# Altium PCB Tj_Monitor.PcbDoc
Units mil, origin at the board's own origin, x right, y up, seen from the top; angles counter-clockwise.
Board outline 605 x 540 mil, 2 copper layers (Top Layer, Bottom Layer); 8 components, 7 nets, 28 pads, 0 vias.
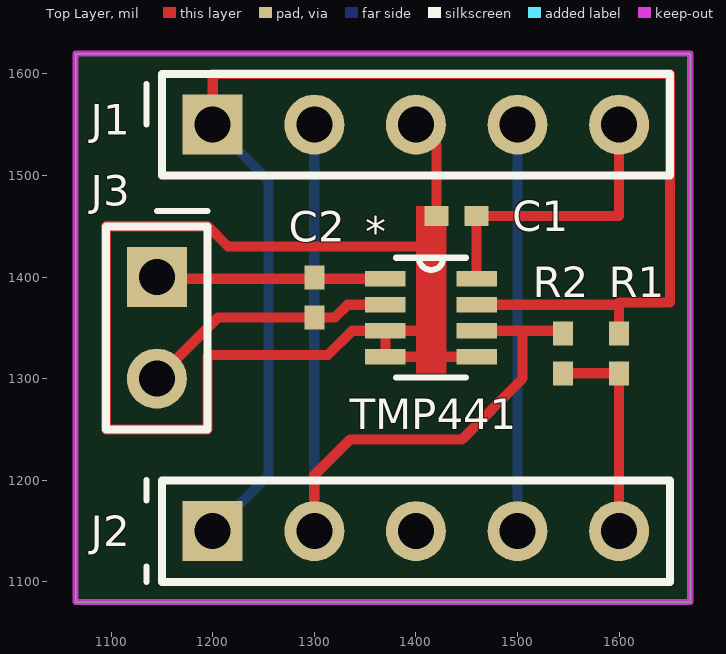
[diagram p0: Top Layer view]
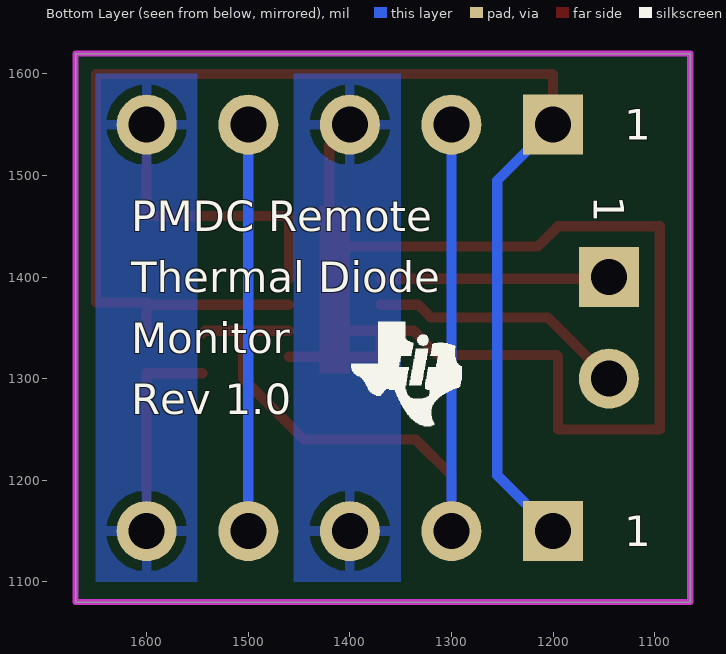
[diagram p1: Bottom Layer view, seen from below]

## Layer stack, top to bottom
Top Layer: signal copper 1.4
Dielectric: dielectric 12.6, FR-4, Dk 4.8
Bottom Layer: signal copper 1.4

## Board outline
1065,1620 1670,1620 1670,1080 1065,1080 1065,1620

## Design rules (kind name [scope] priority, off if disabled: settings)
Clearance [All] p1: gap=10
MinimumSolderMaskSliver [All] p1: minsoldermaskwidth=2
PolygonConnect [All] p1: connectstyle=Relief reliefconductorwidth=10 reliefentries=4 polygonreliefangle="90 Angle"
RoomDefinition Tj_Monitor [InComponentClass('Tj_Monitor')] p1: confinementstyle=ConfineIn formatcopy=TRUE lockcomponents=FALSE outline 455,535 4500,535 4500,3895 455,3895
RoutingVias [All] p1: holewidth=28 width=50 viastyle="Through Hole" minholewidth=28 minwidth=50 maxholewidth=28 maxwidth=50
SilkscreenOverComponentPads [All] p1: minsilkscreentomaskgap=10
SolderMaskExpansion [All] p1: expansion=4
Width [All] p1: maxlimit=50 minlimit=6 preferedwidth=10 minimp=50.000000 maximp=50.000000 favimp=50.000000
26 further rules are at their usual default settings.

## Components (designator, comment, footprint, x,y, rotation, side; value= is the part's Value field where it differs from the comment)
C1 "Cap Semi" 0402 1440,1460 r0 top
C2 "Cap Semi" 0402 1300,1380 r90 top
J1 "Header 5" HDR1X5 1200,1550 r0 top
J2 "Header 5" HDR1X5 1200,1150 r0 top
J3 "Header 2" HDR1X2 1145,1400 r270 top
R1 "Res3" 0402 1600,1325 r270 top
R2 "Res3" 0402 1545,1325 r270 top
TMP441 "TMP441_DCN_8" DCN8-L 1415,1360 r0 top

## Footprints (in the part's own frame and the unit in brackets; to place one, negate y for a bottom-side part, rotate by r counter-clockwise, add the part's x,y. Pads: shape width x height; smd on the part's side, far side on the other; paste and mask are expansions set on the pad)
0402 [mm] "Chip Capacitor, Body 1.0x0.5mm, IPC High Density"
  rect 0.6x0.5 smd: 1(-0.5,0) 2(0.5,0)
  body extent -0.55,-0.3 0.55,0.3, height 1.3
DCN8-L [mil]
  rect 40x15 smd: 1(-45,38.39) 2(-45,12.8) 3(-45,-12.8) 4(-45,-38.39) 5(45,-38.39) 6(45,-12.8) 7(45,12.8) 8(45,38.39)
  silkscreen extent -34,-59 34,59
HDR1X2 [mm] "Connector; Header; 2 Position"
  rect 1.5x1.5 hole 0.9: 1(0,0)
  round 1.5 hole 0.9: 2(2.54,0)
  silkscreen extent -1.27,-1.27 3.81,1.27
HDR1X5 [mm] "Connector; Header; 5 Position"
  rect 1.5x1.5 hole 0.9: 1(0,0)
  round 1.5 hole 0.9: 2(2.54,0) 3(5.08,0) 4(7.62,0) 5(10.16,0)
  silkscreen extent -1.27,-1.27 11.43,1.27

## Part data
C1 C2: "Capacitor (Semiconductor SIM Model)"
J1 J2: "Header, 5-Pin"
J3: "Header, 2-Pin"
R1 R2: "Resistor"
TMP441: "Imported"

## Nets (pads, with @x,y where several pads share a name; then routed paths per layer and width w, separated by ;. In a path a pad name is that pad's centre, name@x,y a point inside that pad or via, vN(x,y) a via of type N, cw(c..) or ccw(c..) an arc to the next point about the centre after c; other vN are vias at no path point)
GND: C1.1 J1.3 J2.3 TMP441.3 TMP441.4 TMP441.5 | length 1136.8
  Top Layer w10: J1.3 1420.32,1529.69 C1.1 ; 1410,1430 1215,1430 1195,1450 1095,1450 1095,1250 1195,1250 1195,1321.72 1196.64,1323.36 1313.36,1323.36 1337.2,1347.2 TMP441.3 ; 1412.2,1347.2 TMP441.3 ; TMP441.5 TMP441.4 TMP441.3
PADN: C2.1 J3.2 TMP441.2 | length 255.2
  Top Layer w10: J3.2 1205.32,1360.32 C2.1 1320.32,1360.32 1332.8,1372.8 TMP441.2
PADP: C2.2 J3.1 TMP441.1 | length 225.7
  Top Layer w10: J3.1 1146.61,1398.39 TMP441.1
PM_ALERT: J1.4 J2.4 | length 400
  Bottom Layer w10: J2.4 J1.4
PWRMON_I2CSCL: J1.1 J2.1 R1.1 TMP441.7 | length 1390.7
  Top Layer w10: J1.1 1200,1600 1650,1600 1650,1375 1599.41,1375 1597.2,1372.8 ; TMP441.7 1597.2,1372.8 ; R1.1 1600,1370 1597.2,1372.8
  Bottom Layer w10: J2.1 1255,1205 1255,1495 J1.1
PWRMON_I2CSDA: J1.2 J2.2 R2.1 TMP441.6 | length 832.6
  Top Layer w10: J2.2 1300,1205 1335,1240 1445,1240 1505,1300 1505,1347.2 ; TMP441.6 1505,1347.2 ; R2.1 1542.48,1347.2 1505,1347.2
  Bottom Layer w10: J2.2 J1.2
V3_3D: C1.2 J1.5 J2.5 R1.2 R2.2 TMP441.8 | length 502.4
  Top Layer w10: TMP441.8 1459.69,1398.7 C1.2 1600,1460 J1.5 ; R2.2 R1.2 J2.5

## Polygon pours and split planes (outlines as drawn)
V3_3D on Bottom Layer "Top Overlay-No Net" (solid, pour order 4): 1650,1600 1550,1600 1550,1100 1650,1100 1650,1600
GND on Bottom Layer "Top Overlay-No Net" (solid, pour order 8): 1350,1600 1350,1100 1455,1100 1455,1600 1350,1600

## Keep-outs
Keep-Out Layer:
  the board outline again, w6

## Other copper
Top Layer:
  rectangle net GND: 1400,1305 1430,1470

## Silkscreen, mask and mechanical layers (free items; w line width, h text height)
Top Overlay:
  lines w6: 1135,1100 1135,1115 ; 1135,1180 1135,1200 ; 1135,1550 1135,1590 ; 1145,1465 1195,1465
Bottom Overlay:
  drawing of 3 lines, arcs and shapes, not listed
  text "1" at 1130,1535 h30
  text "1" at 1160,1480 h30 r90
  text "PMDC Remote" at 1615,1445 h30
  text "Thermal Diode" at 1615,1385 h30
  text "Monitor" at 1615,1325 h30
  text "Rev 1.0" at 1615,1265 h30
  text "1" at 1130,1135 h30

## Text inside footprints (layer, text, board x,y; h text height)
TMP441: Top Overlay "*" at 1350,1430 h30